# EAGLE board ch_control (EAGLE 6.3)
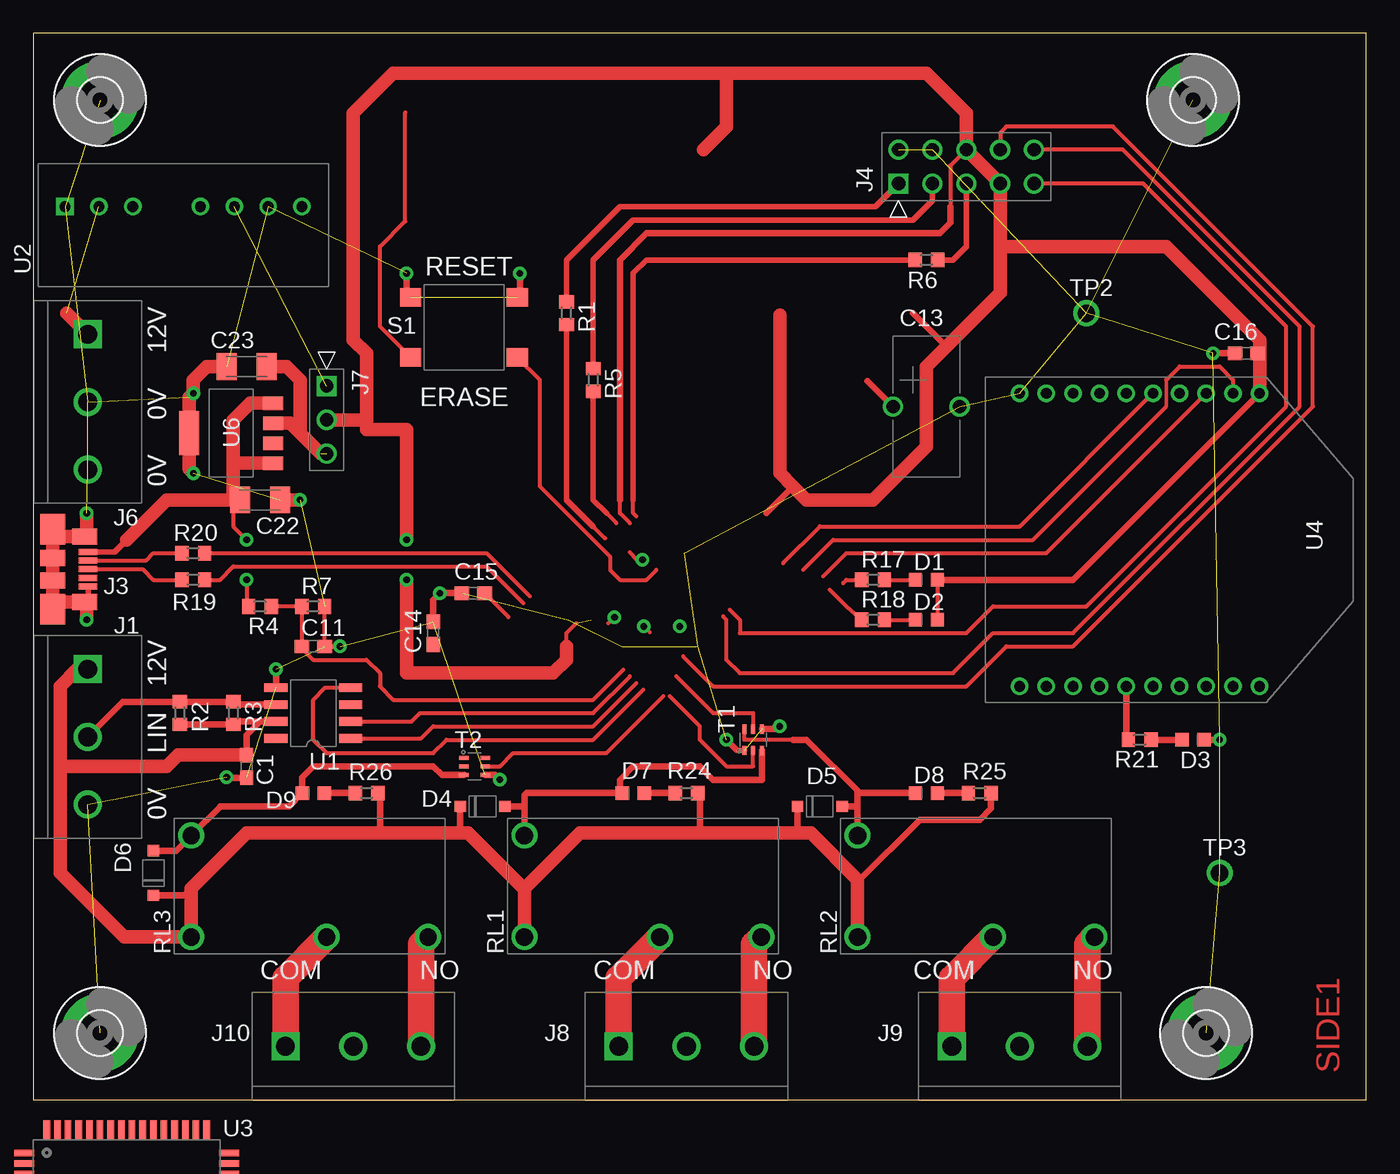
[diagram p0: board, top side]
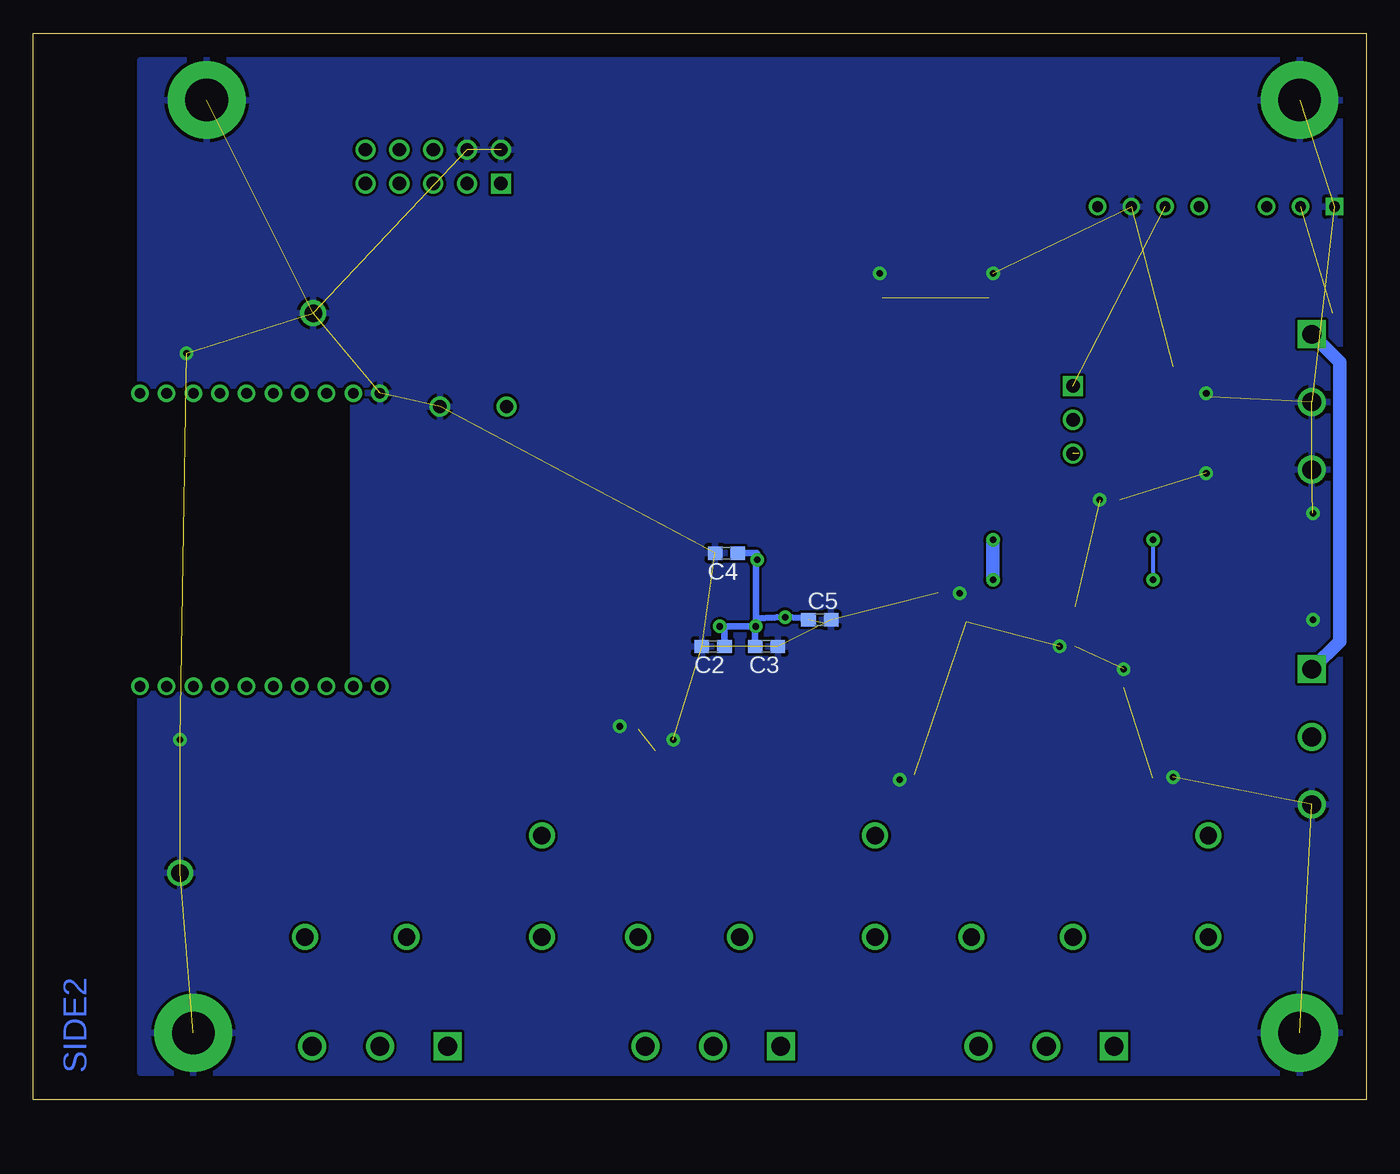
[diagram p1: board, bottom side, seen from below]

Size 100 x 80 mm. Coordinates in mm from the lower left corner, seen from the top.
Outline: 0,0 100,0 100,80 0,80 0,0
Copper layers (1*16): Top 0.035mm / dielectric 1.5mm / Bottom 0.035mm
Design rules "pcbtrain *": minimum track width 0.2mm, minimum drill 0.4mm, track to track 0.2mm, track to pad 0.2mm, pad to pad 0.2mm, via to via 0.2mm, smd to smd 0mil, copper to edge 10mil, drill to drill 0.2mm, minimum pad ring 10mil, minimum via ring 10mil, stop-mask expansion 0.125mm, vias tented up to drill 1mm, thermal gap 10mil

## Footprints (pad centres in the part's own frame; a part is rotated, then mirrored left to right if it is on the bottom)
C0603 = smd 1.1 x 1: 1 -0.85,0; 2 0.85,0
RG_V = drill 1: 1 -2.5,0; 2 2.5,0
C1206K = smd 1.5 x 2: 1 -1.5,0; 2 1.5,0
LED_0603 = smd 1 x 1: 1 -0.825,0; 2 0.825,0
SOD123 = smd 0.85 x 0.85: 1 -1.675,0; 2 1.675,0
3,2-PAD = drill 3.2 pad 5.842: B3,2 0,0
MKDSN_1.5_3_5.08 = drill 1.4 square: 1 -5.08,0 | drill 1.4: 2 0,0; 3 5.08,0
MICRO_USB = smd 1.4 x 0.45: 1 4.1,1.3; 2 4.1,0.65; 3 4.1,0; 4 4.1,-0.65; 5 4.1,-1.3 | smd 1.9 x 2.3: S1 1.45,3; S4 1.45,-3 | smd 1.9 x 1.2: S2 1.45,0.85; S3 1.45,-0.85; S5 3.85,2.45; S6 3.85,-2.45
HEADER-5X2-0.1 = drill 1 square: 1 -1.27,5.08 | drill 1: 2 1.27,5.08; 3 -1.27,2.54; 4 1.27,2.54; 5 -1.27,0; 6 1.27,0; 7 -1.27,-2.54; 8 1.27,-2.54; 9 -1.27,-5.08; 10 1.27,-5.08
HEADER-1X3-0.1 = drill 1 square: 1 -2.54,0 | drill 1: 2 0,0; 3 2.54,0
R0603 = smd 1 x 1.1: 1 -0.85,0; 2 0.85,0
G5Q-1A = drill 1.3: 1 -3.81,10.16; 2 -3.81,0; 3 -3.81,-7.62; 5 3.81,10.16
B3FS = smd 1.6 x 1.4: 1 4,-2.25; 2 -4,-2.25; 3 4,2.25; 4 -4,2.25
SOT363 = smd 0.7 x 0.3: 1 -0.8,0.65; 2 -0.8,0; 3 -0.8,-0.65; 4 0.8,-0.65; 5 0.8,0; 6 0.8,0.65
TP1.3 = drill 1.3: 1 0,0
SOIC8_N = smd 1.75 x 0.65: 1 -2.8,1.905; 2 -2.8,0.635; 3 -2.8,-0.635; 4 -2.8,-1.905; 5 2.8,-1.905; 6 2.8,-0.635; 7 2.8,0.635; 8 2.8,1.905
TMR2 = drill 0.8 square: 1 0,7.62 | drill 0.8: 2 0,5.08; 3 0,2.54; 5 0,-2.54; 6 0,-5.08; 7 0,-7.62; 8 0,-10.16
TQFP64 = smd 1.5 x 0.5: 1 -7.7,6; 2 -7.7,5.2; 3 -7.7,4.4; 4 -7.7,3.6; 5 -7.7,2.8; 6 -7.7,2; 7 -7.7,1.2; 8 -7.7,0.4; 9 -7.7,-0.4; 10 -7.7,-1.2; 11 -7.7,-2; 12 -7.7,-2.8; 13 -7.7,-3.6; 14 -7.7,-4.4; 15 -7.7,-5.2; 16 -7.7,-6; 33 7.7,-6; 34 7.7,-5.2; 35 7.7,-4.4; 36 7.7,-3.6; 37 7.7,-2.8; 38 7.7,-2; 39 7.7,-1.2; 40 7.7,-0.4; 41 7.7,0.4; 42 7.7,1.2; 43 7.7,2; 44 7.7,2.8; 45 7.7,3.6; 46 7.7,4.4; 47 7.7,5.2; 48 7.7,6 | smd 0.5 x 1.5: 17 -6,-7.7; 18 -5.2,-7.7; 19 -4.4,-7.7; 20 -3.6,-7.7; 21 -2.8,-7.7; 22 -2,-7.7; 23 -1.2,-7.7; 24 -0.4,-7.7; 25 0.4,-7.7; 26 1.2,-7.7; 27 2,-7.7; 28 2.8,-7.7; 29 3.6,-7.7; 30 4.4,-7.7; 31 5.2,-7.7; 32 6,-7.7; 49 6,7.7; 50 5.2,7.7; 51 4.4,7.7; 52 3.6,7.7; 53 2.8,7.7; 54 2,7.7; 55 1.2,7.7; 56 0.4,7.7; 57 -0.4,7.7; 58 -1.2,7.7; 59 -2,7.7; 60 -2.8,7.7; 61 -3.6,7.7; 62 -4.4,7.7; 63 -5.2,7.7; 64 -6,7.7
ZB24 = drill 0.8 pad 1.15: 1 -11,0; 2 -11,-2; 3 -11,-4; 4 -11,-6; 5 -11,-8; 6 -11,-10; 7 -11,-12; 8 -11,-14; 9 -11,-16; 10 -11,-18; 11 11,-18; 12 11,-16; 13 11,-14; 14 11,-12; 15 11,-10; 16 11,-8; 17 11,-6; 18 11,-4; 19 11,-2; 20 11,0
SOT223 = smd 1 x 1.5: 1 -2.25,0; 2 -0.75,0; 3 0.75,0; 4 2.25,0 | smd 3.3 x 1.5: 5 0,6.3

## Placement (x,y rotation side)
C1  100n  [C0603]  16,25 270 top
C2  100n  [C0603]  49,34 180 bottom
C3  100n  [C0603]  45,34 0 bottom
C4  100n  [C0603]  48,41 180 bottom
C5  100n  [C0603]  41,36 0 bottom
C11  10p  [C0603]  21,34 0 top
C13  0.22F  [RG_V]  67,52 0 top
C14  10p  [C0603]  30,35 90 top
C15  10p  [C0603]  33,38 180 top
C16  100n  [C0603]  91,56 180 top
C22  1u  [C1206K]  17,45 0 top
C23  1u  [C1206K]  16,55 180 top
D1  SML-D12U8W  [LED_0603]  67,39 0 top
D2  SML-D12U8W  [LED_0603]  67,36 0 top
D3  SML-D12U8W  [LED_0603]  87,27 180 top
D4  1N4148W-V  [SOD123]  33.7,22 0 top
D5  1N4148W-V  [SOD123]  59,22 0 top
D6  1N4148W-V  [SOD123]  9,17 90 top
D7  SML-D12U8W  [LED_0603]  45,23 0 top
D8  SML-D12U8W  [LED_0603]  67,23 0 top
D9  SML-D12U8W  [LED_0603]  21,23 0 top
H1  MOUNT-PAD-ROUND3.2  [3,2-PAD]  87,75 0 top
H2  MOUNT-PAD-ROUND3.2  [3,2-PAD]  88,5 0 top
H3  MOUNT-PAD-ROUND3.2  [3,2-PAD]  5,5 0 top
H4  MOUNT-PAD-ROUND3.2  [3,2-PAD]  5,75 0 top
J1  MKDSN1.5/3-5.08  [MKDSN_1.5_3_5.08]  4.08,27.21 270 top
J3  MICRO_USB  [MICRO_USB]  0,39.8 0 top
J4  HEADER-5X2-0.1  [HEADER-5X2-0.1]  70,70 90 top
J6  MKDSN1.5/3-5.08  [MKDSN_1.5_3_5.08]  4.08,52.34 270 top
J7  HEADER-1X3-0.1  [HEADER-1X3-0.1]  22,51 270 top
J8  MKDSN1.5/3-5.08  [MKDSN_1.5_3_5.08]  49,4 0 top
J9  MKDSN1.5/3-5.08  [MKDSN_1.5_3_5.08]  74,4 0 top
J10  MKDSN1.5/3-5.08  [MKDSN_1.5_3_5.08]  24,4 0 top
R1  [R0603]  40,59 270 top
R2  2k  [R0603]  11,29 270 top
R3  2k  [R0603]  15,29 270 top
R4  47k  [R0603]  17,37 0 top
R5  [R0603]  42,54 270 top
R6  [R0603]  67,63 180 top
R7  68k  [R0603]  21,37 0 top
R17  330R  [R0603]  63,39 0 top
R18  330R  [R0603]  63,36 0 top
R19  27R  [R0603]  12,39 180 top
R20  27R  [R0603]  12,41 180 top
R21  330R  [R0603]  83,27 0 top
R24  2k  [R0603]  49,23 180 top
R25  2k  [R0603]  71,23 180 top
R26  2k  [R0603]  25,23 180 top
RL1  G5Q1A12DC  [G5Q-1A]  47,16 90 top
RL2  G5Q1A12DC  [G5Q-1A]  72,16 90 top
RL3  G5Q1A12DC  [G5Q-1A]  22,16 90 top
S1  B3FS-1000P  [B3FS]  32.31,57.93 0 top
T1  PUMH9  [SOT363]  54,27 90 top
T2  PUMH9  [SOT363]  33.1,25 0 top
TP2  TP1.3  [TP1.3]  79,59 0 top
TP3  TP1.3  [TP1.3]  89,17 0 top
U1  MCP2021  [SOIC8_N]  21,29 180 top
U2  TMR1210  [TMR2]  10,67 90 top
U3  ATXMEGA-A3BU  [TQFP64]  7,-10 0 top
U4  XB24-Z7CIT-004  [ZB24]  92,42 270 top
U6  LP38693  [SOT223]  18,50 90 top

## Library data of the parts
C1-C5 C11 C14-C16 C22 C23 R1-R7 R17-R21 R24-R26 = resistor
C13 D1-D9 J1 J3 J4 J6-J10 RL1-RL3 S1 T1 T2 TP2 TP3 U1-U4 U6 = ahs
H1-H4 = holes

## Nets
+3V3: C2.1 C3.1 C4.1 C5.1 C16.1 D1.2 D2.2 J4.6 J4.7 J7.2 U4.1
+12V: C1.1 D4.1 D5.1 D6.1 J1.1 J6.1 R2.2 R3.2 R24.1 R25.1 R26.1 RL1.1 RL2.1 RL3.1 U1.7 U2.2
BUT1_N: J4.8
BUT2_N: J4.10
BUT3_N: J4.9
GND: C1.2 C2.2 C3.2 C4.2 C5.2 C11.2 C13.2 C14.2 C15.2 C16.2 C22.2 C23.2 D3.1 H1.B3,2 H2.B3,2 H3.B3,2 H4.B3,2 J1.3 J3.5 J3.S1 J3.S2 J3.S3 J3.S4 J3.S5 J3.S6 J4.2 J4.4 J6.2 J6.3 R7.2 S1.3 S1.4 T1.1 T1.4 T2.4 TP2.1 TP3.1 U1.5 U2.1 U2.7 U4.10 U6.5
LED1_N: J4.1 R1.1
LED2_N: J4.3 R5.1
LED3_N: J4.5 R6.1
LIN_CS: U1.2
LIN_RXD: U1.1
LIN_TXD: U1.4
N$1: C11.1 R4.2 R7.1
N$2: J8.3 RL1.3
N$3: J8.1 RL1.2
N$4: J9.3 RL2.3
N$5: R19.1
N$6: J9.1 RL2.2
N$7: D4.2 D7.1 RL1.5 T1.3
N$8: D5.2 D8.1 RL2.5 T1.6
N$9: R20.1
N$10: J1.2 R2.1 R3.1 U1.6
N$11: C13.1
N$12: R21.1 U4.15
N$13: D3.2 R21.2
N$14: S1.1
N$15: C15.1
N$17: J7.1 U2.6
N$19: C23.1 J7.3 U6.3
N$20: R1.2
N$21: R5.2
N$22: J10.3 RL3.3
N$23: D7.2 R24.2
N$24: J10.1 RL3.2
N$25: D6.2 D9.1 RL3.5 T2.3
N$27: R6.2
N$30: D8.2 R25.2
N$31: D2.1 R18.2
N$32: D1.1 R17.2
N$33: J3.2 R20.2
N$34: J3.3 R19.2
N$35: R18.1
N$36: D9.2 R26.2
N$39: R17.1
NRST: S1.2
RELAY1: T1.5
RELAY2: T1.2
RELAY3: T2.5
TRXD: U4.2
VUSB: C22.1 J3.1 R4.1 U6.1 U6.4
ZRST_N: U4.5
ZTXD: U4.3

## Tracks (layer width: path | path; a pad name or v marks a point on that pad's centre or on a via)
+3V3  (via drill 0.5)  (1 unrouted)
  Top 0.3: 43.15,35.75 v43.6,36.2 | v48.5,35.5 48.75,35.25 | v45.8,35.5 46.25,35.05 | C16.1 92,55.85 | 40.75,35.75 40,35 40,34 | 44.75,41.05 45.3,40.5 v45.7,40.5 | D1.2 D2.2 | 44.75,43.25 44,44 44,45 | J4.6 68.8,70.07 68.8,67
  Top 0.5: 56,54 55.91,53.91 | 68.5,56.5 66,59 | 57,46 55,44 | D1.2 78,39 U4.1 | 44,45 44,63 46,65 68,65 68.8,65.8 68.8,67 | 92,56 C16.1 | 45,77 40.85,77 37.15,77
  Top 1: 56,58.85 56,54 56,47 57,46 58,45 63,45 67,49 67,55 68.5,56.5 72.54,60.54 72.54,64 | 25,51 25,56 24,57 24,74 27,77 29,77 37.15,77 45,77 49.15,77 52,77 | 25,51 J7.2 | 25,51 25,50.27 28,50.27 v28,42 | v28,39 28,32 39,32 40,33 40,34 | U4.1 92,56 92,57 85,64 72.54,64 | 52,77 67,77 70,74 J4.6 J4.7 72.54,64 | 50.27,71.27 52,73 52,77
  Bottom 0.3: C5.1 41.95,36.1 | C3.1 45.8,34.05
  Bottom 0.5: C4.1 45.7,41 v45.7,40.5 45.8,40.5 v45.8,35.5 | 48.15,35.5 v48.5,35.5 | 48.15,35.5 C2.1 | v45.8,35.5 48.15,35.5 | C3.1 45.85,35.5 v45.8,35.5 | v45.8,35.5 45.8,36.1 v43.6,36.2 41.85,36.1 C5.1
  Bottom 1: v28,39 v28,42
+12V  (1 unrouted)
  Top 0.5: R2.2 R3.2 15.21,28.36 17,28.36 | 17,28.36 U1.7 | C1.1 16,27.36 17,28.36 | R26.1 26,22.85 26,20 | R24.1 50,22.85 50,20 | R25.1 71.85,21.85 71,21 66.52,21 61.84,16.32 | D6.1 11.32,15.32 12,16 | D4.1 32.02,20.02 32,20 | D5.1 57.33,20.32 57,20
  Top 1: RL1.1 36.84,15.84 37,16 | 37,16 41,20 50,20 57,20 58.33,20 61.84,16.48 61.84,16.32 RL2.1 | 37,16 36.62,16 32.62,20 32,20 26,20 16,20 12,16 11.84,15.84 RL3.1 6.81,12.19 2,17 2,25 | J1.1 3.29,32.29 2,31 2,25 | J6.1 2.5,59 | C1.1 10.85,25.85 10,25 2,25
  Bottom 1: J6.1 2,55.34 2,34.37 J1.1
BUT1_N
  Top 0.3: 48.75,33.25 51,31 70,31 73,34 78,34 96,52 96,58 81,73 73,73 72.54,72.54 J4.8
BUT2_N
  Top 0.3: 51.75,36.25 52,36 52,33 53,32 69,32 72,35 78,35 95,52 95,58 81.73,71.27 J4.10
BUT3_N
  Top 0.3: 52.25,36.75 53,36 53,35 70,35 72,37 79,37 94,52 94,58 83.27,68.73 J4.9
GND  (via drill 0.5)  (32 unrouted)
  Top 0.3: R7.2 C11.2 v23,34
  Top 0.4: T1.1 52.8,26.2 v52,27 | 4.1,37.6 J3.5
  Top 0.5: D3.1 v89,27 | C15.2 v30.5,38 30,37.5 C14.2 | v88.5,56 C16.2 | v36.5,62 36.5,60.18 S1.3 | U1.5 v18.2,32.3 | C1.2 14.55,24.15 v14.5,24.2 | T2.4 34.65,24.35 v35,24 | T1.4 55.8,27.8 v56,28 | v28,62 28,60.49 S1.4 | J3.S6 4.1,37.6
  Top 1: C23.2 13,55 12,54 v12,53 11.7,52.7 U6.5 11.7,47.3 v12,47 | C22.2 v20,45 | v4,36 4,37.2 J3.S6 2,37.35 J3.S4 J3.S3 J3.S2 J3.S1 2,42.25 J3.S5 4,42.4 v4,44
  pour Bottom: 2,2 2,39 2,44 2,78 92,78 92,53 76,53 76,31 92,31 92,2
LED1_N
  Top 0.4: R1.1 40,63 44,67 63.19,67 J4.1
LED2_N
  Top 0.4: R5.1 42,63 45,66 66,66 67.46,67.46 J4.3
LED3_N
  Top 0.4: R6.1 69,63 70,64 J4.5
LIN_CS
  Top 0.3: 44.75,31.75 42,29 29,29 28.36,28.36 U1.2
LIN_RXD
  Top 0.3: 45.25,31.25 42,28 30,28 29.09,27.09 U1.1
LIN_TXD
  Top 0.3: U1.4 21.91,30.91 21,30 21,27 22,26 30,26 31,27 42,27 45.75,30.75
N$1
  Top 0.3: R4.2 R7.1 C11.1 20.15,33.85 21,33 25,33 26,32 26,31 27,30 42,30 44.25,32.25
N$2
  Top 2: J8.3 54.08,11.65 RL1.3
N$3
  Top 2: J8.1 43.92,9.11 RL1.2
N$4
  Top 2: J9.3 79.08,11.65 RL2.3
N$5
  Top 0.3: 36.75,37.25 34,40 15,40 14,39 R19.1
N$6
  Top 2: J9.1 68.92,9.11 RL2.2
N$7
  Top 0.5: RL1.5 36.84,22 | 36.84,22 36.84,22.84 37,23 D7.1 44,23.18 44,24 45,25 50,25 51,24 54.65,24 T1.3 | 36.84,22 D4.2
N$8
  Top 0.3: T1.6 53.35,27 57,27
  Top 0.5: RL2.5 61.84,22 | 61.84,22 61.84,23 62,23 | 62,23 D8.1 | 61.84,22 D5.2 | 62,23 58,27 57,27
N$9
  Top 0.3: 37.25,37.75 34,41 R20.1
N$10
  Top 0.5: U1.6 15.21,29.64 R3.1 R2.1 6.72,29.85 J1.2
N$11
  Top 0.5: 62.59,53.91 C13.1
N$12
  Top 0.3: R21.1 82,27.15
  Top 0.5: 82,27.15 U4.15
N$13
  Top 0.5: D3.2 R21.2
N$14
  Top 0.3: S1.1 38,53.99 38,46 43.3,40.7 43.3,39.7 44,39 46,39 46.75,39.75
N$15
  Top 0.3: C15.1 35.65,36.2
N$17  (1 unrouted)
N$19  (1 unrouted)
  Top 1: 20,50 19.25,50.75 U6.3 | 20,50 21.54,48.46 | C23.1 19,55 20,54 20,50
N$20
  Top 0.3: 42,43 42.9,42.1
  Top 0.4: R1.2 40,45 42,43
N$21
  Top 0.3: 43.75,43.25 43,44
  Top 0.4: 43,44 42,45 R5.2
N$22
  Top 2: J10.3 29.08,11.65 RL3.3
N$23
  Top 0.5: R24.2 D7.2
N$24
  Top 2: J10.1 18.92,9.11 RL3.2
N$25
  Top 0.5: T2.3 30.65,24.35 30,25 21,25 20.18,24.18 D9.1 19.18,22 14,22 14,21.97 RL3.5 10.71,18.68 D6.2
N$27
  Top 0.3: 45,45 45,44 45.25,43.75
  Top 0.4: R6.2 46,63 45,62 45,45
N$30
  Top 0.5: D8.2 R25.2
N$31
  Top 0.3: R18.2 D2.1
N$32
  Top 0.3: R17.2 D1.1
N$33
  Top 0.3: J3.2 8.45,40.45 9,41 R20.2
N$34
  Top 0.3: J3.3 8.2,39.8 9,39 R19.2
N$35
  Top 0.3: 59.75,38.25 61,37 R18.1
N$36
  Top 0.5: D9.2 R26.2
N$39
  Top 0.3: 60.75,38.75 61,39 R17.1
NRST
  Top 0.3: S1.2 26,58 26,64 27.9,65.9 27.9,74.05
RELAY1
  Top 0.3: 48.25,31.75 51,29 54,29 T1.5
RELAY2
  Top 0.3: 47.75,30.25 50,28 50,27 52,25 54,25 T1.2
RELAY3
  Top 0.3: 43,26 47.25,30.25 | 36,26 35,25 T2.5
  Top 0.305: 36,26 43,26
TRXD
  Top 0.25: 85,52 85,54
  Top 0.3: 85,54 86,55 89,55 90,54 U4.2 | 57.75,39.75 60,42 75,42 85,52
VUSB  (via drill 0.5)
  Top 0.3: R4.1 16,37.15 v16,39 | v16,42 15,43 15,45
  Top 0.4: J3.1 6.1,41.1 7,42
  Top 1: U6.4 16.25,52.25 15,51 15,48 | 15,48 15,45.5 C22.1 15,45 10,45 7,42 | U6.1 15.25,47.75 15,48
  Bottom 0.3: v16,42 v16,39
ZRST_N
  Top 0.3: 56.25,40.25 59,43 74,43 U4.5
ZTXD
  Top 0.3: 59.25,39.25 61,41 76,41 U4.3

## Text on the board
Top: SIDE1
Bottom: SIDE2
tPlace: RESET | 12V | ERASE | 0V | 0V | 12V | LIN | 0V | COM | NO | COM | NO | COM | NO